# Altium PCB PCB1.PcbDoc (part 2 of 4)
Units mil, origin at the board's own origin, x right, y up, seen from the top; angles counter-clockwise.
Board outline 5048.23 x 6841.54 mil, 6 copper layers (Top Layer, Layer 1, Layer 2, Layer 3, Layer 4, Bottom Layer), stack 32.112 mil thick; 417 components, 339 nets, 2232 pads, 0 vias.
Unrouted connection lines stored in the file: 1169.
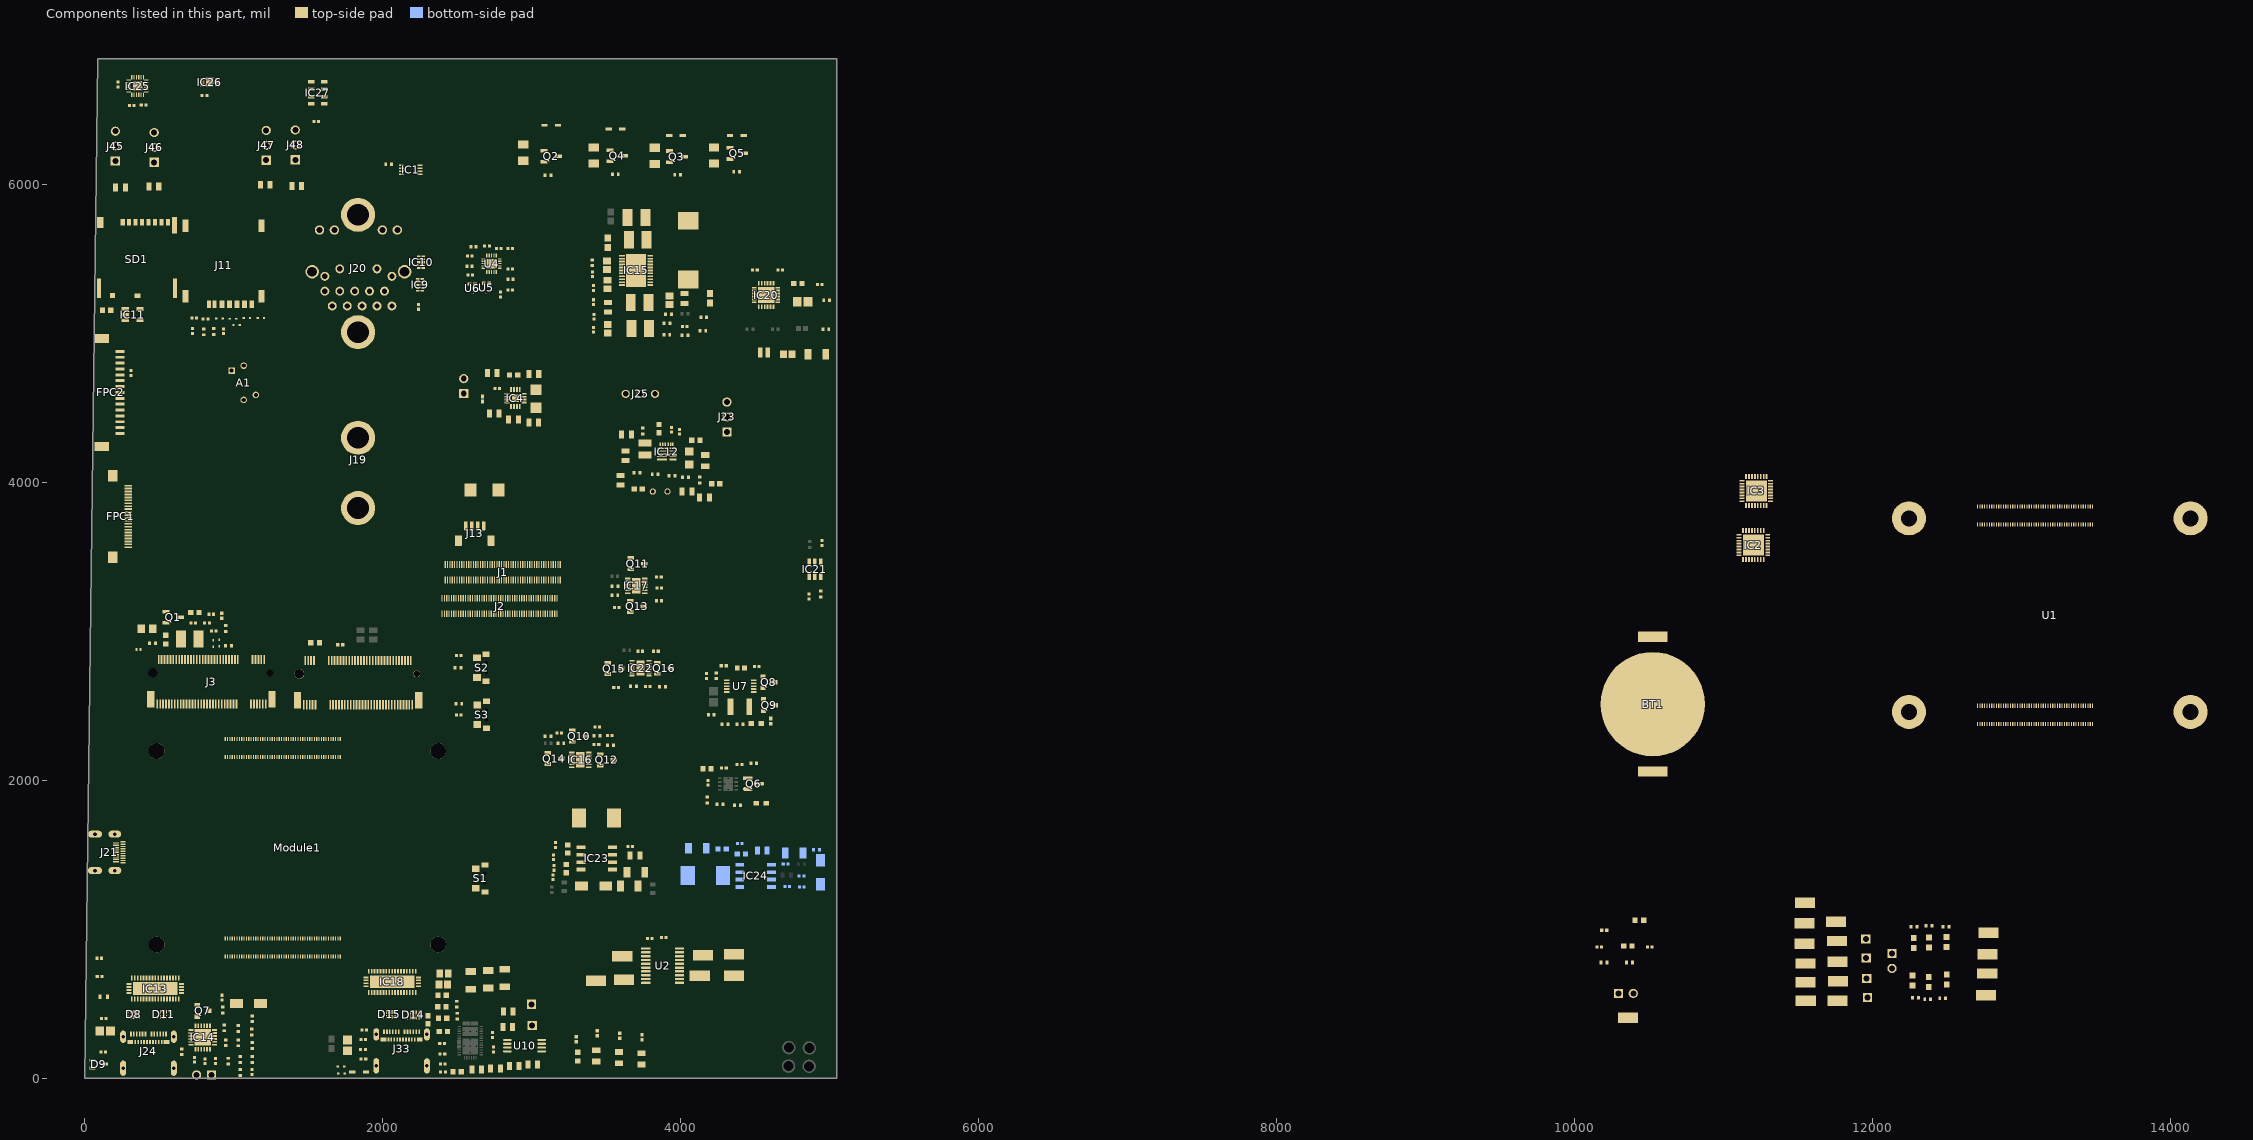
[diagram p2: the components of this part, seen from the top]

## Footprints (in the part's own frame and the unit in brackets; to place one, negate y for a bottom-side part, rotate by r counter-clockwise, add the part's x,y. Pads: shape width x height; smd on the part's side, far side on the other; paste and mask are expansions set on the pad) (continued)
"M.2 M Key connector RPI" [mm]
  rect 0.3x1.55 smd mask+0.102: 1(-9.25,5.275) 2(-9,-2.275) 3(-8.75,5.275) 4(-8.5,-2.275) 5(-8.25,5.275) 6(-8,-2.275) 7(-7.75,5.275) 8(-7.5,-2.275) 9(-7.25,5.275) 10(-7,-2.275) 11(-6.75,5.275) 12(-6.5,-2.275) 13(-6.25,5.275) 14(-6,-2.275) 15(-5.75,5.275) 16(-5.5,-2.275) 17(-5.25,5.275) 18(-5,-2.275) 19(-4.75,5.275) 20(-4.5,-2.275) 21(-4.25,5.275) 22(-4,-2.275) 23(-3.75,5.275) 24(-3.5,-2.275) 25(-3.25,5.275) 26(-3,-2.275) 27(-2.75,5.275) 28(-2.5,-2.275) 29(-2.25,5.275) 30(-2,-2.275) 31(-1.75,5.275) 32(-1.5,-2.275) 33(-1.25,5.275) 34(-1,-2.275) 35(-0.75,5.275) 36(-0.5,-2.275) 37(-0.25,5.275) 38(0,-2.275) 39(0.25,5.275) 40(0.5,-2.275) 41(0.75,5.275) 42(1,-2.275) 43(1.25,5.275) 44(1.5,-2.275) 45(1.75,5.275) 46(2,-2.275) 47(2.25,5.275) 48(2.5,-2.275) 49(2.75,5.275) 50(3,-2.275) 51(3.25,5.275) 52(3.5,-2.275) 53(3.75,5.275) 54(4,-2.275) 55(4.25,5.275) 56(4.5,-2.275) 57(4.75,5.275) 58(5,-2.275) 67(7.25,5.275) 68(7.5,-2.275) 69(7.75,5.275) 70(8,-2.275) 71(8.25,5.275) 72(8.5,-2.275) 73(8.75,5.275) 74(9,-2.275) 75(9.25,5.275)
  round 5.8 hole 3.7 paste-2539.97 mask+0.2: M1(0,-28.25) M2(0,-40.25) M3(0,-58.25) M4(0,-78.25)
  rect 1.2x2.75 smd mask+0.102: S1(-10.35,4.5) S2(10.35,4.5)
  round 1.15 hole 1.15 paste-2539.97 mask+0: Un1(-10,0)
  round 1.65 hole 1.65 paste-2539.97 mask+0: Un2(10,0)
  silkscreen extent -11.5,-78.25 11.5,6.9, body extent -11.1,-3.15 11.1,6.15, height 0.25
MIC-SMD_3P-L2.8-W1.9_AP1688 [mm]
  rect 0.65x0.545 smd paste-100 mask+0.051: 1(0.475,0.739) 2(-0.475,0.739)
  round 0 smd: 3(0,-0.739)
  round 0.5 hole 0.5 unplated paste-2539.97: ""(0,-0.739)
  silkscreen extent -0.99,-1.68 0.99,1.2
MODULE_CM5108032 [mm]
  rect 0.2x0.7 smd paste+0 mask+0.102: 1(7.3,18.54) 2(7.3,15.46) 3(6.9,18.54) 4(6.9,15.46) 5(6.5,18.54) 6(6.5,15.46) 7(6.1,18.54) 8(6.1,15.46) 9(5.7,18.54) 10(5.7,15.46) 11(5.3,18.54) 12(5.3,15.46) 13(4.9,18.54) 14(4.9,15.46) 15(4.5,18.54) 16(4.5,15.46) 17(4.1,18.54) 18(4.1,15.46) 19(3.7,18.54) 20(3.7,15.46) 21(3.3,18.54) 22(3.3,15.46) 23(2.9,18.54) 24(2.9,15.46) 25(2.5,18.54) 26(2.5,15.46) 27(2.1,18.54) 28(2.1,15.46) 29(1.7,18.54) 30(1.7,15.46) 31(1.3,18.54) 32(1.3,15.46) 33(0.9,18.54) 34(0.9,15.46) 35(0.5,18.54) 36(0.5,15.46) 37(0.1,18.54) 38(0.1,15.46) 39(-0.3,18.54) 40(-0.3,15.46) 41(-0.7,18.54) 42(-0.7,15.46) 43(-1.1,18.54) 44(-1.1,15.46) 45(-1.5,18.54) 46(-1.5,15.46) 47(-1.9,18.54) 48(-1.9,15.46) 49(-2.3,18.54) 50(-2.3,15.46) 51(-2.7,18.54) 52(-2.7,15.46) 53(-3.1,18.54) 54(-3.1,15.46) 55(-3.5,18.54) 56(-3.5,15.46) 57(-3.9,18.54) 58(-3.9,15.46) 59(-4.3,18.54) 60(-4.3,15.46) 61(-4.7,18.54) 62(-4.7,15.46) 63(-5.1,18.54) 64(-5.1,15.46) 65(-5.5,18.54) 66(-5.5,15.46) 67(-5.9,18.54) 68(-5.9,15.46) 69(-6.3,18.54) 70(-6.3,15.46) 71(-6.7,18.54) 72(-6.7,15.46) 73(-7.1,18.54) 74(-7.1,15.46) 75(-7.5,18.54) 76(-7.5,15.46) 77(-7.9,18.54) 78(-7.9,15.46) 79(-8.3,18.54) 80(-8.3,15.46) 81(-8.7,18.54) 82(-8.7,15.46) 83(-9.1,18.54) 84(-9.1,15.46) 85(-9.5,18.54) 86(-9.5,15.46) 87(-9.9,18.54) 88(-9.9,15.46) 89(-10.3,18.54) 90(-10.3,15.46) 91(-10.7,18.54) 92(-10.7,15.46) 93(-11.1,18.54) 94(-11.1,15.46) 95(-11.5,18.54) 96(-11.5,15.46) 97(-11.9,18.54) 98(-11.9,15.46) 99(-12.3,18.54) 100(-12.3,15.46) 101(7.3,-15.46) 102(7.3,-18.54) 103(6.9,-15.46) 104(6.9,-18.54) 105(6.5,-15.46) 106(6.5,-18.54) 107(6.1,-15.46) 108(6.1,-18.54) 109(5.7,-15.46) 110(5.7,-18.54) 111(5.3,-15.46) 112(5.3,-18.54) 113(4.9,-15.46) 114(4.9,-18.54) 115(4.5,-15.46) 116(4.5,-18.54) 117(4.1,-15.46) 118(4.1,-18.54) 119(3.7,-15.46) 120(3.7,-18.54) 121(3.3,-15.46) 122(3.3,-18.54) 123(2.9,-15.46) 124(2.9,-18.54) 125(2.5,-15.46) 126(2.5,-18.54) 127(2.1,-15.46) 128(2.1,-18.54) 129(1.7,-15.46) 130(1.7,-18.54) 131(1.3,-15.46) 132(1.3,-18.54) 133(0.9,-15.46) 134(0.9,-18.54) 135(0.5,-15.46) 136(0.5,-18.54) 137(0.1,-15.46) 138(0.1,-18.54) 139(-0.3,-15.46) 140(-0.3,-18.54) 141(-0.7,-15.46) 142(-0.7,-18.54) 143(-1.1,-15.46) 144(-1.1,-18.54) 145(-1.5,-15.46) 146(-1.5,-18.54) 147(-1.9,-15.46) 148(-1.9,-18.54) 149(-2.3,-15.46) 150(-2.3,-18.54) 151(-2.7,-15.46) 152(-2.7,-18.54) 153(-3.1,-15.46) 154(-3.1,-18.54) 155(-3.5,-15.46) 156(-3.5,-18.54) 157(-3.9,-15.46) 158(-3.9,-18.54) 159(-4.3,-15.46) 160(-4.3,-18.54) 161(-4.7,-15.46) 162(-4.7,-18.54) 163(-5.1,-15.46) 164(-5.1,-18.54) 165(-5.5,-15.46) 166(-5.5,-18.54) 167(-5.9,-15.46) 168(-5.9,-18.54) 169(-6.3,-15.46) 170(-6.3,-18.54) 171(-6.7,-15.46) 172(-6.7,-18.54) 173(-7.1,-15.46) 174(-7.1,-18.54) 175(-7.5,-15.46) 176(-7.5,-18.54) 177(-7.9,-15.46) 178(-7.9,-18.54) 179(-8.3,-15.46) 180(-8.3,-18.54) 181(-8.7,-15.46) 182(-8.7,-18.54) 183(-9.1,-15.46) 184(-9.1,-18.54) 185(-9.5,-15.46) 186(-9.5,-18.54) 187(-9.9,-15.46) 188(-9.9,-18.54) 189(-10.3,-15.46) 190(-10.3,-18.54) 191(-10.7,-15.46) 192(-10.7,-18.54) 193(-11.1,-15.46) 194(-11.1,-18.54) 195(-11.5,-15.46) 196(-11.5,-18.54) 197(-11.9,-15.46) 198(-11.9,-18.54) 199(-12.3,-15.46) 200(-12.3,-18.54)
  round 5.8 hole 2.7 mask+0.102: SH1(-24,16.5) SH2(24,16.5) SH3(-24,-16.5) SH4(24,-16.5)
  silkscreen extent -27.5,-20 27.5,20.85, body extent -27.5,-20 27.5,20, height 10.12
MS5607-02BA03 [mm]
  rect 1.1x0.6 smd: 1(-1.1,1.875) 2(-1.1,0.625) 3(-1.1,-0.625) 4(-1.1,-1.875) 5(1.1,-1.875) 6(1.1,-0.625) 7(1.1,0.625) 8(1.1,1.875)
  silkscreen extent -1.5,-2.5 1.5,2.9, body extent -1.5,-2.4 1.5,2.6, height 0.95
"MSOP-10_L3.0-W3.0-P0.50-LS4.9-BL - duplicate" [mm]
  oval 0.3x1 smd: 1(-1,-2.3) 2(-0.5,-2.3) 3(0,-2.3) 4(0.5,-2.3) 5(1,-2.3) 6(1,2.3) 7(0.5,2.3) 8(0,2.3) 9(-0.5,2.3) 10(-1,2.3)
  silkscreen extent -1.52,-1.5 1.5,1.5
ONSC-SOT-23-3-318-08_V [mm] "SOT23, 3-Leads, Body 2.92x1.3mm, Pitch 0.95mm"
  rect 0.9x0.8 smd: 1(-1,0.95) 2(-1,-0.95) 3(1,0)
  silkscreen extent -1.12,-1.46 0.65,2.02, body extent -0.65,-1.46 0.65,1.46, height 1.11
PCBComponent_1 [mm]
  rect 1x2.1 smd: 8(-5.688,6.54) 9(7.312,6.54) 10(7.312,-5.46) 11(-5.688,-5.46)
  rect 0.8x1.3 smd: C1(1.062,7.885) C2(-1.478,7.885) C3(-4.018,7.884) C6(-0.208,7.885) C7(-2.748,7.885)
  rect 0.65x1.3 smd: C5(2.332,7.885) CD(3.282,7.885)
  Keep-Out Layer board cut-out: -3.813,-4.21 -3.85,-4.372 -3.954,-4.503 -4.104,-4.575 -4.271,-4.575 -4.422,-4.503 -4.526,-4.372 -4.563,-4.21 -4.563,-4.21 -4.526,-4.047 -4.422,-3.916 -4.271,-3.844 -4.104,-3.844 -3.954,-3.916 -3.85,-4.047 -3.813,-4.21
  Keep-Out Layer board cut-out: 4.687,-4.21 4.65,-4.372 4.546,-4.503 4.395,-4.575 4.229,-4.575 4.078,-4.503 3.974,-4.372 3.937,-4.21 3.937,-4.21 3.974,-4.047 4.078,-3.916 4.229,-3.844 4.395,-3.844 4.546,-3.916 4.65,-4.047 4.687,-4.21
  Keep-Out Layer circle w0.025: c-4.188,-4.21 r0.375
  Keep-Out Layer circle w0.025: c4.312,-4.21 r0.375
  Keep-Out Layer region: -3.813,-4.21 -3.85,-4.372 -3.954,-4.503 -4.104,-4.575 -4.271,-4.575 -4.422,-4.503 -4.526,-4.372 -4.563,-4.21 -4.563,-4.21 -4.526,-4.047 -4.422,-3.916 -4.271,-3.844 -4.104,-3.844 -3.954,-3.916 -3.85,-4.047 -3.813,-4.21
  Keep-Out Layer region: 4.687,-4.21 4.65,-4.372 4.546,-4.503 4.395,-4.575 4.229,-4.575 4.078,-4.503 3.974,-4.372 3.937,-4.21 3.937,-4.21 3.974,-4.047 4.078,-3.916 4.229,-3.844 4.395,-3.844 4.546,-3.916 4.65,-4.047 4.687,-4.21
  silkscreen extent -5.23,-6.27 6.85,7.38
QFN40P300X300X95-25N-D [mm]
  rect 0.75x0.2 smd: 1(-1.5,1) 2(-1.5,0.6) 3(-1.5,0.2) 4(-1.5,-0.2) 5(-1.5,-0.6) 6(-1.5,-1) 13(1.5,-1) 14(1.5,-0.6) 15(1.5,-0.2) 16(1.5,0.2) 17(1.5,0.6) 18(1.5,1)
  rect 0.2x0.75 smd: 7(-1,-1.5) 8(-0.6,-1.5) 9(-0.2,-1.5) 10(0.2,-1.5) 11(0.6,-1.5) 12(1,-1.5) 19(1,1.5) 20(0.6,1.5) 21(0.2,1.5) 22(-0.2,1.5) 23(-0.6,1.5) 24(-1,1.5)
  rect 1.59x1.75 smd: 25(0,0)
  silkscreen extent -1.97,1.5 -1.78,1.7, body extent -1.5,-1.5 1.5,1.5, height 0.94
QFN50P300X300X80-17N [mm]
  rect 0.85x0.3 smd: 1(-1.45,0.75) 2(-1.45,0.25) 3(-1.45,-0.25) 4(-1.45,-0.75) 9(1.45,-0.75) 10(1.45,-0.25) 11(1.45,0.25) 12(1.45,0.75)
  rect 0.3x0.85 smd: 5(-0.75,-1.45) 6(-0.25,-1.45) 7(0.25,-1.45) 8(0.75,-1.45) 13(0.75,1.45) 14(0.25,1.45) 15(-0.25,1.45) 16(-0.75,1.45)
  rect 1.25x1.25 smd: 17(0,0)
  silkscreen extent -2,1.38 -1.75,1.62, body extent -1.55,-1.55 1.55,1.55, height 0.8
QFN50P350X900X80-43N-D [mm]
  rect 0.85x0.3 smd: 1(-1.8,4) 2(-1.8,3.5) 3(-1.8,3) 4(-1.8,2.5) 5(-1.8,2) 6(-1.8,1.5) 7(-1.8,1) 8(-1.8,0.5) 9(-1.8,0) 10(-1.8,-0.5) 11(-1.8,-1) 12(-1.8,-1.5) 13(-1.8,-2) 14(-1.8,-2.5) 15(-1.8,-3) 16(-1.8,-3.5) 17(-1.8,-4) 22(1.8,-4) 23(1.8,-3.5) 24(1.8,-3) 25(1.8,-2.5) 26(1.8,-2) 27(1.8,-1.5) 28(1.8,-1) 29(1.8,-0.5) 30(1.8,0) 31(1.8,0.5) 32(1.8,1) 33(1.8,1.5) 34(1.8,2) 35(1.8,2.5) 36(1.8,3) 37(1.8,3.5) 38(1.8,4)
  rect 0.3x0.85 smd: 18(-0.75,-4.45) 19(-0.25,-4.45) 20(0.25,-4.45) 21(0.75,-4.45) 39(0.75,4.45) 40(0.25,4.45) 41(-0.25,4.45) 42(-0.75,4.45)
  rect 2.15x7.65 smd: 43(0,0)
  silkscreen extent -2.22,4.62 -1.98,4.87, body extent -1.75,-4.5 1.75,4.5, height 0.8
QFN50P400X400X100-25N-D [mm]
  rect 0.8x0.3 smd: 1(-2,1.25) 2(-2,0.75) 3(-2,0.25) 4(-2,-0.25) 5(-2,-0.75) 6(-2,-1.25) 13(2,-1.25) 14(2,-0.75) 15(2,-0.25) 16(2,0.25) 17(2,0.75) 18(2,1.25)
  rect 0.3x0.8 smd: 7(-1.25,-2) 8(-0.75,-2) 9(-0.25,-2) 10(0.25,-2) 11(0.75,-2) 12(1.25,-2) 19(1.25,2) 20(0.75,2) 21(0.25,2) 22(-0.25,2) 23(-0.75,2) 24(-1.25,2)
  rect 2.8x2.8 smd: 25(0,0)
  silkscreen extent -2.52,1.88 -2.27,2.12, body extent -2.05,-2.05 2.05,2.05, height 1
QFN50P500X500X100-33N-D [mm]
  rect 0.85x0.3 smd: 1(-2.45,1.75) 2(-2.45,1.25) 3(-2.45,0.75) 4(-2.45,0.25) 5(-2.45,-0.25) 6(-2.45,-0.75) 7(-2.45,-1.25) 8(-2.45,-1.75) 17(2.45,-1.75) 18(2.45,-1.25) 19(2.45,-0.75) 20(2.45,-0.25) 21(2.45,0.25) 22(2.45,0.75) 23(2.45,1.25) 24(2.45,1.75)
  rect 0.3x0.85 smd: 9(-1.75,-2.45) 10(-1.25,-2.45) 11(-0.75,-2.45) 12(-0.25,-2.45) 13(0.25,-2.45) 14(0.75,-2.45) 15(1.25,-2.45) 16(1.75,-2.45) 25(1.75,2.45) 26(1.25,2.45) 27(0.75,2.45) 28(0.25,2.45) 29(-0.25,2.45) 30(-0.75,2.45) 31(-1.25,2.45) 32(-1.75,2.45)
  rect 3.6x3.6 smd: 33(0,0)
  silkscreen extent -3,2.38 -2.75,2.62, body extent -2.55,-2.55 2.55,2.55, height 1
QFN-20_L3.0-W3.0-P0.40-BL-EP1.7 [mm]
  rect 0.2x0.665 smd paste-100 mask+0.051: 1(-0.8,-1.407) 2(-0.4,-1.407) 3(0,-1.407) 4(0.4,-1.407) 5(0.8,-1.407) 11(0.8,1.407) 12(0.4,1.407) 13(0,1.407) 14(-0.4,1.407) 15(-0.8,1.407)
  rect 0.665x0.2 smd paste-100 mask+0.051: 6(1.407,-0.8) 7(1.407,-0.4) 8(1.407,0) 9(1.407,0.4) 10(1.407,0.8) 16(-1.407,0.8) 17(-1.407,0.4) 18(-1.407,0) 19(-1.407,-0.4) 20(-1.407,-0.8)
  rect 1.65x1.65 smd paste-100 mask+0.051: 21(0,0)
  silkscreen extent -1.58,-2.11 1.58,1.58
RJ45-TH_LPJG0926HENL_C22457393 [mil]
  round 60 hole 35.43 paste-99999 mask+1.97: 1(-225,254.93) 2(-175,154.93) 3(-125,254.93) 4(-75,154.93) 5(-25,254.93) 6(25,154.93) 7(75,254.93) 8(125,154.93) 9(175,254.93) 10(225,154.93) 11(-225,55.71) 12(-125,5.71) 13(125,5.71) 14(225,55.71)
  round 62.99 hole 40.16 paste-99999 mask+1.97: 15(-261.03,-254.92) 16(-161.03,-254.92) 17(161.02,-254.92) 18(261.02,-254.92)
  round 90.55 hole 66.93 paste-99999 mask+1.97: 19(-310.04,25) 20(310.04,25)
  Keep-Out Layer board cut-out: 287.99,-95.08 281.75,-122.41 264.27,-144.33 239.01,-156.49 210.98,-156.49 185.72,-144.33 168.24,-122.41 162,-95.08 162,-95.08 168.24,-67.75 185.72,-45.83 210.98,-33.67 239.01,-33.67 264.27,-45.83 281.75,-67.75 287.99,-95.08
  Keep-Out Layer board cut-out: -162.01,-95.08 -168.25,-122.41 -185.73,-144.33 -210.99,-156.49 -239.02,-156.49 -264.28,-144.33 -281.76,-122.41 -288,-95.08 -288,-95.08 -281.76,-67.75 -264.28,-45.83 -239.02,-33.67 -210.99,-33.67 -185.73,-45.83 -168.25,-67.75 -162.01,-95.08
  Keep-Out Layer circle w1: c224.99,-95.08 r62.99
  Keep-Out Layer circle w1: c-225.01,-95.08 r62.99
  Keep-Out Layer region: 287.99,-95.08 281.75,-122.41 264.27,-144.33 239.01,-156.49 210.98,-156.49 185.72,-144.33 168.24,-122.41 162,-95.08 162,-95.08 168.24,-67.75 185.72,-45.83 210.98,-33.67 239.01,-33.67 264.27,-45.83 281.75,-67.75 287.99,-95.08
  Keep-Out Layer region: -162.01,-95.08 -168.25,-122.41 -185.73,-144.33 -210.99,-156.49 -239.02,-156.49 -264.28,-144.33 -281.76,-122.41 -288,-95.08 -288,-95.08 -281.76,-67.75 -264.28,-45.83 -239.02,-33.67 -210.99,-33.67 -185.73,-45.83 -168.25,-67.75 -162.01,-95.08
  silkscreen extent -314,-520 314,316
SMB_L4.6-W3.6-LS5.3-RD [mil]
  rect 80.61x86.31 smd paste+0 mask+2: 1(-92.94,0) 2(92.94,0)
  silkscreen extent -123,-77 108,77
SOD2513X120N [mm]
  rect 1.075x0.5 smd: 1(-1.162,0) 2(1.162,0)
  silkscreen extent -1.7,-0.65 0.85,0.65, body extent -1.25,-0.65 1.25,0.65, height 1.2
SODFL1060X40N [mm]
  rect 0.41x0.31 smd: 1(-0.55,0) 2(0.55,0)
  silkscreen extent -1.28,-0.08 -1.12,0.08, body extent -0.5,-0.3 0.5,0.3, height 0.4
SOIC127P600X175-8N [mm]
  rect 1.525x0.65 smd: 1(-2.712,1.905) 2(-2.712,0.635) 3(-2.712,-0.635) 4(-2.712,-1.905) 5(2.712,-1.905) 6(2.712,-0.635) 7(2.712,0.635) 8(2.712,1.905)
  silkscreen extent -3.47,-2.45 1.6,2.58, body extent -3,-2.45 3,2.45, height 1.75
"SOLDER BRIDGE" [mm]
  rect 1x1 smd: 1(-0.6,0) 2(1.1,0)
  Top Layer region: -0.5,-1 0,-1 0,1 -0.5,1
  Top Layer region: -1,-0.5 -0.5,-0.5 -0.5,0.5 -1,0.5
  Top Layer region: 1.5,0.5 1,0.5 1,-0.5 1.5,-0.5
  Top Layer region: 1,1 0.5,1 0.5,-1 1,-1
  Top Layer lines w1: -0.498,0.49 ccw(c-0.4,0) -0.498,-0.49 ; 0.998,0.49 cw(c0.9,0) 0.998,-0.49
SON40P250X200X40-9N-D [mm]
  rect 0.75x0.2 smd: 1(-1.25,0.6) 2(-1.25,0.2) 3(-1.25,-0.2) 4(-1.25,-0.6) 5(1.25,-0.6) 6(1.25,-0.2) 7(1.25,0.2) 8(1.25,0.6)
  rect 1.35x1.7 smd: 9(0,0)
  silkscreen extent -1.75,1.08 -1.5,1.32, body extent -1.3,-1 1.3,1, height 0.4
SON50P300X300X80-13N-D [mm]
  rect 0.9x0.3 smd: 1(-1.45,1.25) 2(-1.45,0.75) 3(-1.45,0.25) 4(-1.45,-0.25) 5(-1.45,-0.75) 6(-1.45,-1.25) 7(1.45,-1.25) 8(1.45,-0.75) 9(1.45,-0.25) 10(1.45,0.25) 11(1.45,0.75) 12(1.45,1.25)
  rect 1.4x2.6 smd: 13(0,0)
  silkscreen extent -2.02,1.78 -1.77,2.02, body extent -1.5,-1.5 1.5,1.5, height 0.8
SON50P500X600X150-23N [mm]
  rect 0.95x0.3 smd: 1(-2.4,2.5) 2(-2.4,2) 3(-2.4,1.5) 4(-2.4,1) 5(-2.4,0.5) 6(-2.4,0) 7(-2.4,-0.5) 8(-2.4,-1) 9(-2.4,-1.5) 10(-2.4,-2) 11(-2.4,-2.5) 12(2.4,-2.5) 13(2.4,-2) 14(2.4,-1.5) 15(2.4,-1) 16(2.4,-0.5) 17(2.4,0) 18(2.4,0.5) 19(2.4,1) 20(2.4,1.5) 21(2.4,2) 22(2.4,2.5)
  rect 3.34x5.579 smd: 23(0,0)
  silkscreen extent -3,3.03 -2.75,3.27, body extent -2.5,-3 2.5,3, height 1.5
SOP50P310X90-8N [mm]
  rect 0.85x0.3 smd: 1(-1.575,0.75) 2(-1.575,0.25) 3(-1.575,-0.25) 4(-1.575,-0.75) 5(1.575,-0.75) 6(1.575,-0.25) 7(1.575,0.25) 8(1.575,0.75)
  silkscreen extent -2,-1 0.8,1.25, body extent -1.55,-1 1.55,1, height 0.77
SOP65P640X120-20N [mm]
  rrect25% 1.57x0.41 smd: 1(-2.87,2.925) 2(-2.87,2.275) 3(-2.87,1.625) 4(-2.87,0.975) 5(-2.87,0.325) 6(-2.87,-0.325) 7(-2.87,-0.975) 8(-2.87,-1.625) 9(-2.87,-2.275) 10(-2.87,-2.925) 11(2.87,-2.925) 12(2.87,-2.275) 13(2.87,-1.625) 14(2.87,-0.975) 15(2.87,-0.325) 16(2.87,0.325) 17(2.87,0.975) 18(2.87,1.625) 19(2.87,2.275) 20(2.87,2.925)
  silkscreen extent -4.29,-3.45 2.2,3.45, body extent -3.2,-3.25 3.2,3.25, height 1.2
SOT65P210X110-3N [mm]
  rect 1.05x0.5 smd: 1(-1.05,0.65) 2(-1.05,-0.65) 3(1.05,0)
  silkscreen extent -1.58,-1 0.18,1.15, body extent -1.05,-1 1.05,1, height 1.1
SOT94P280X100-5N [mm]
  rect 1.25x0.65 smd: 1(-1.25,0.94) 2(-1.25,0) 3(-1.25,-0.94) 4(1.25,-0.94) 5(1.25,0.94)
  silkscreen extent -1.88,-1.45 0.28,1.51, body extent -1.4,-1.45 1.4,1.45, height 1
SOT95P280X125-3N [mm]
  rect 1.2x0.6 smd: 1(-1.25,0.95) 2(-1.25,-0.95) 3(1.25,0)
  silkscreen extent -1.85,-1.48 0.3,1.5, body extent -1.4,-1.48 1.4,1.48, height 1.25
SOT95P280X140-6N [mm]
  rect 1.15x0.6 smd: 1(-1.25,0.95) 2(-1.25,0) 3(-1.25,-0.95) 4(1.25,-0.95) 5(1.25,0) 6(1.25,0.95)
  silkscreen extent -1.83,-1.45 0.33,1.6, body extent -1.4,-1.45 1.4,1.45, height 1.4
SY6982CQDC [mm]
  rect 0.25x0.575 smd: 1(-1.125,1.363) 2(-0.675,1.363) 3(-0.225,1.363) 4(0.225,1.363) 5(0.675,1.363) 6(1.065,1.363)
  rect 1.17x0.225 smd: 7(1.065,0.688)
  rect 1.17x0.2 smd: 8(1.065,0.225) 9(1.065,-0.225) 10(1.065,-0.675)
  rect 1.17x0.35 smd: 11(1.065,-1.2)
  rect 1.68x0.35 smd: 12(-0.81,-1.2)
  rect 1.68x0.2 smd: 13(-0.81,-0.675) 14(-0.81,-0.225) 15(-0.81,0.225)
  rect 1.68x0.225 smd: 16(-0.81,0.688)
  silkscreen extent -1.17,2 -1.08,2.1, body extent -1.5,-1.5 1.5,1.5, height 1
TF-SMD_503398-1892 [mm]
  rect 0.7x1.1 smd: 1(-2.42,6.27) 2(-1.32,6.27) 3(-0.22,6.27) 4(0.88,6.27) 5(1.98,6.27) 6(3.08,6.27) 7(4.18,6.27) 8(5.28,6.27)
  rect 1.05x0.78 smd: 9(0.095,-6.27)
  rect 0.9x0.9 smd: 10(-4.17,-6.21)
  rect 0.7x3.33 smd: 11(-6.48,-4.995) 11(6.48,-4.995)
  rect 1.14x1.83 smd: 11(-6.26,6.255)
  rect 0.86x2.8 smd: 11(6.4,5.77)
  silkscreen extent -6.55,-6.27 6.55,7.78
THERM_NXRT15XH103FA1B030 [mm]
  round 1.05 hole 0.65: 1(-1.25,0) 2(1.25,0)
  silkscreen extent -2,-1 2,1, body extent -2,-1 2,1, height 7.49
TO292P930H600-4 [mm]
  rect 1.1x1.1 / inner round 1.1 / far side rect 1.1x1.1 hole 0.7: 1(-2.065,2.065)
  round 1.1 hole 0.7: 2(0,-2.92) 3(2.065,-2.065) 4(0,2.92)
  silkscreen extent -4.9,-4.65 4.65,5.12, body extent -4.65,-4.65 4.65,5.08, height 6.1
TS24CA [mm]
  rect 0.9x1.2 smd: 1(-2.3,0) 2(2.3,0)
  rect 1.15x1.3 smd: 3(-1.675,-1.55) 4(1.675,-1.55)
  round 0.3 hole 0.6 unplated: MH1(-0.85,0) MH2(0.85,0)
  silkscreen extent -3.4,-0.15 2.3,2.1
TSSOP-8_L4.4-W3.0-P0.65-LS6.4-BL [mil]
  oval 13.9x57.24 smd: 1(-38.39,-115.24) 2(-12.79,-115.24) 3(12.8,-115.24) 4(38.39,-115.24) 5(38.39,115.24) 6(12.8,115.24) 7(-12.79,115.24) 8(-38.39,115.24)
  silkscreen extent -59,-76 59,77
USB-C-SMD_TYPE-C-USB-18 [mm]
  oval 1x2.6 hole 0.6 slot 2.1 at 90 deg paste-2539.97 mask+0.05: 0(-4.32,-2.91) 0(4.32,-2.91)
  oval 1x2.1 hole 0.6 slot 1.6 at 90 deg paste-2539.97 mask+0.05: 0(-4.32,2.45) 0(4.32,2.45)
  rect 0.3x0.8 smd paste-100 mask+0.051: A1(-3,2.91) A2(-2.5,2.91) A3(-2,2.91) A4(-1.5,2.91) A5(-1,2.91) A6(-0.5,2.91) A7(0.5,2.91) A8(1,2.91) A9(1.5,2.91) A10(2,2.91) A11(2.5,2.91) A12(3,2.91)
  rect 1x0.7 smd paste-100 mask+0.05: B1(3.1,1.56) B12(-3.1,1.56)
  rect 0.3x0.7 smd paste-100 mask+0.051: B2(2.25,1.56) B3(1.75,1.56) B4(1.25,1.56) B5(0.75,1.56) B6(0.25,1.56) B7(-0.25,1.56) B8(-0.75,1.56) B9(-1.25,1.56) B10(-1.75,1.56) B11(-2.25,1.56)
  silkscreen extent -4.32,-4.68 4.32,3.66
X1-DFN1006-2_L1.0-W0.6-P0.65-BI [mm]
  rect 0.35x0.55 smd: 1(-0.325,0) 2(0.325,0)
  silkscreen extent -0.91,-0.52 0.91,0.52

## Part data
A1: "LCSC do not place / Buy from digikey: MLX90640ESF-BAA-000-SP", Package="TO39_? FOV 110-4 Melexis", Check_prices=https://www.snapeda.com/parts/MLX90640ESF-BAA-000-TU/Melexis/view-part/?ref=eda, MF="Melexis Technologies", MP=MLX90640ESF-BAA-000-TU, SnapEDA_Link=https://www.snapeda.com/parts/MLX90640ESF-BAA-000-TU/Melexis/view-part/?ref=snap
BT1: library part "RTC battery", "DNP", Case/Package=SMD/SMT, Package Quantity=500, Contact Material=Nickel, Contact Plating=Tin, Height=4.31mm, Lead Free="Lead Free", Material=Bronze, Mounting Technology="Surface Mount,PCB", Number of Batteries=1, Number of Cells=1, Number Of Contacts=2, Packaging="Tape and Reel", Series=-, Termination=SMD/SMT
C1 C4 C116 C117: library part CMP-03020-014070-2, "C13533", Capacitance="0.10 μF", Manufacturer=Kemet, Manufacturer Part Number=C0402C104M3PAC7867, Package=C0402-BB, Temperature="-55°C to +125°C", Temperature Characteristic=X5R, Temperature Coefficient=15%, Temperature Range High=+125°C, Temperature Range Low=-55°C, Tolerance=0.2, Voltage Rating="25 V", Automotive=No, Category=Cap, ComponentLink2Description=Datasheet, ComponentLink2URL=https://content.kemet.com/datasheets/KEM_C1002_X7R_SMD.pdf, Device Class L1="Passive Components", Device Class L2=Capacitors, Device Class L3="Ceramic Capacitors", Digikey Description="CAP CER 0.1UF 25V X5R 0402", Height=0.55mm, Ipc Land Pattern Name=CAPC10050X50, Lead Free=Yes, Material=Ceramic, Octopart=https://octopart.com/c0402c104m3pac7867-kemet-84304880, RoHS=TRUE
C2 C14 C15 C32 C35 C43 C50 C97 C98 C104 C108 C109 C114 C118: library part CMP-00621-81932632-1, "C96446", Capacitance=10µF, Case/Package=0603, Dielectric=X5R, Max Operating Temperature=85°C, Min Operating Temperature=-55°C, Tolerance=10%, Voltage Rating=16V, Halogen Free="Halogen Free", Height=1mm, Lead Free="Lead Free", Material=Ceramic, NexarPartId=81932632, RoHS=Non-Compliant, Voltage Rating (DC)=16V
C3 C20 C21 C22 C23 C24 C27 C28 C39 C52 C64 C65 C66 C67 C68 C105: library part CMP-03020-014070-2, "C52923", Capacitance="0.10 μF", Manufacturer=Kemet, Manufacturer Part Number=C0402C104M3PAC7867, Package=C0402-BB, Temperature="-55°C to +125°C", Temperature Characteristic=X5R, Temperature Coefficient=15%, Temperature Range High=+125°C, Temperature Range Low=-55°C, Tolerance=0.2, Voltage Rating="25 V", Automotive=No, Category=Cap, ComponentLink2Description=Datasheet, ComponentLink2URL=https://content.kemet.com/datasheets/KEM_C1002_X7R_SMD.pdf, Device Class L1="Passive Components", Device Class L2=Capacitors, Device Class L3="Ceramic Capacitors", Digikey Description="CAP CER 0.1UF 25V X5R 0402", Height=0.55mm, Ipc Land Pattern Name=CAPC10050X50, Lead Free=Yes, Material=Ceramic, Octopart=https://octopart.com/c0402c104m3pac7867-kemet-84304880, RoHS=TRUE
C5 C72 C73 C74 C75: library part CMP-03422-001480-1, "C7432790", Capacitance=220uF, Case/Package=1210, Max Operating Temperature=85°C, Min Operating Temperature=-55°C, Tolerance=20%, Voltage Rating=6.3V, Mount="Surface Mount", Packaging="Tape and Reel", RoHS Compliant=Yes
C6 C8 C9 C10 C16 C17 C18 C19 C25 C26 C29 C30 C31 C33 C34 C36 C40 C44 C45 C53 C54 C55 C56 C57 C62 C63 C69 C70 C76 C83 C84 C85 C86 C92 C95 C103 C107 C122 C131 C132 C133 C135: library part CMP-03020-014070-2, "C307331", Capacitance="0.10 μF", Manufacturer=Kemet, Manufacturer Part Number=C0402C104M3PAC7867, Package=C0402-BB, Temperature="-55°C to +125°C", Temperature Characteristic=X5R, Temperature Coefficient=15%, Temperature Range High=+125°C, Temperature Range Low=-55°C, Tolerance=0.2, Voltage Rating="25 V", Automotive=No, Category=Cap, ComponentLink2Description=Datasheet, ComponentLink2URL=https://content.kemet.com/datasheets/KEM_C1002_X7R_SMD.pdf, Device Class L1="Passive Components", Device Class L2=Capacitors, Device Class L3="Ceramic Capacitors", Digikey Description="CAP CER 0.1UF 25V X5R 0402", Height=0.55mm, Ipc Land Pattern Name=CAPC10050X50, Lead Free=Yes, Material=Ceramic, Octopart=https://octopart.com/c0402c104m3pac7867-kemet-84304880, RoHS=TRUE
C7: library part CMP-03020-014070-2, "C1546", Capacitance="0.10 μF", Manufacturer=Kemet, Manufacturer Part Number=C0402C104M3PAC7867, Package=C0402-BB, Temperature="-55°C to +125°C", Temperature Characteristic=X5R, Temperature Coefficient=15%, Temperature Range High=+125°C, Temperature Range Low=-55°C, Tolerance=0.2, Voltage Rating="25 V", Automotive=No, Category=Cap, ComponentLink2Description=Datasheet, ComponentLink2URL=https://content.kemet.com/datasheets/KEM_C1002_X7R_SMD.pdf, Device Class L1="Passive Components", Device Class L2=Capacitors, Device Class L3="Ceramic Capacitors", Digikey Description="CAP CER 0.1UF 25V X5R 0402", Height=0.55mm, Ipc Land Pattern Name=CAPC10050X50, Lead Free=Yes, Material=Ceramic, Octopart=https://octopart.com/c0402c104m3pac7867-kemet-84304880, RoHS=TRUE
C11 C12 C13: library part CMP-03020-014070-2, "C1555", Capacitance="0.10 μF", Manufacturer=Kemet, Manufacturer Part Number=C0402C104M3PAC7867, Package=C0402-BB, Temperature="-55°C to +125°C", Temperature Characteristic=X5R, Temperature Coefficient=15%, Temperature Range High=+125°C, Temperature Range Low=-55°C, Tolerance=0.2, Voltage Rating="25 V", Automotive=No, Category=Cap, ComponentLink2Description=Datasheet, ComponentLink2URL=https://content.kemet.com/datasheets/KEM_C1002_X7R_SMD.pdf, Device Class L1="Passive Components", Device Class L2=Capacitors, Device Class L3="Ceramic Capacitors", Digikey Description="CAP CER 0.1UF 25V X5R 0402", Height=0.55mm, Ipc Land Pattern Name=CAPC10050X50, Lead Free=Yes, Material=Ceramic, Octopart=https://octopart.com/c0402c104m3pac7867-kemet-84304880, RoHS=TRUE
C37 C48: library part CMP-00621-81932632-1, "C1615", Capacitance=10µF, Case/Package=0603, Dielectric=X5R, Max Operating Temperature=85°C, Min Operating Temperature=-55°C, Tolerance=10%, Voltage Rating=16V, Halogen Free="Halogen Free", Height=1mm, Lead Free="Lead Free", Material=Ceramic, NexarPartId=81932632, RoHS=Non-Compliant, Voltage Rating (DC)=16V
C38 C41 C42 C47 C49 C51 C78 C79 C80 C81 C91 C96 C99 C100 C101 C102 C127 C130 C134: library part CMP-03020-014070-2, "C15195", Capacitance="0.10 μF", Manufacturer=Kemet, Manufacturer Part Number=C0402C104M3PAC7867, Package=C0402-BB, Temperature="-55°C to +125°C", Temperature Characteristic=X5R, Temperature Coefficient=15%, Temperature Range High=+125°C, Temperature Range Low=-55°C, Tolerance=0.2, Voltage Rating="25 V", Automotive=No, Category=Cap, ComponentLink2Description=Datasheet, ComponentLink2URL=https://content.kemet.com/datasheets/KEM_C1002_X7R_SMD.pdf, Device Class L1="Passive Components", Device Class L2=Capacitors, Device Class L3="Ceramic Capacitors", Digikey Description="CAP CER 0.1UF 25V X5R 0402", Height=0.55mm, Ipc Land Pattern Name=CAPC10050X50, Lead Free=Yes, Material=Ceramic, Octopart=https://octopart.com/c0402c104m3pac7867-kemet-84304880, RoHS=TRUE
C46 C82 C113: library part CMP-2007-01094-1, "C48579647", Manufacturer=Kemet, Part Number=C0805F223K5RACTU
C58 C59 C60 C61 C110 C111 C115: library part CMP-2007-04160-1, "C45783", Manufacturer="AVX Interconnect / Elco", Part Number=08051C102KAT4A
C71 C77 C94 C128: library part CMP-03020-014070-2, "C1523", Capacitance="0.10 μF", Manufacturer=Kemet, Manufacturer Part Number=C0402C104M3PAC7867, Package=C0402-BB, Temperature="-55°C to +125°C", Temperature Characteristic=X5R, Temperature Coefficient=15%, Temperature Range High=+125°C, Temperature Range Low=-55°C, Tolerance=0.2, Voltage Rating="25 V", Automotive=No, Category=Cap, ComponentLink2Description=Datasheet, ComponentLink2URL=https://content.kemet.com/datasheets/KEM_C1002_X7R_SMD.pdf, Device Class L1="Passive Components", Device Class L2=Capacitors, Device Class L3="Ceramic Capacitors", Digikey Description="CAP CER 0.1UF 25V X5R 0402", Height=0.55mm, Ipc Land Pattern Name=CAPC10050X50, Lead Free=Yes, Material=Ceramic, Octopart=https://octopart.com/c0402c104m3pac7867-kemet-84304880, RoHS=TRUE
C87 C88 C123 C124: library part CMP-1037-05002-1, "C6119973", Case-EIA=1206, Case-Metric=3216, Rated Voltage="10 V", Tolerance=Â±20%, Max Thickness="1.9 mm", Technology=SMT
C89 C90 C125 C126: library part CMP-00621-81932632-1, "C19666", Capacitance=10µF, Case/Package=0603, Dielectric=X5R, Max Operating Temperature=85°C, Min Operating Temperature=-55°C, Tolerance=10%, Voltage Rating=16V, Halogen Free="Halogen Free", Height=1mm, Lead Free="Lead Free", Material=Ceramic, NexarPartId=81932632, RoHS=Non-Compliant, Voltage Rating (DC)=16V
C93 C129: library part CMP-03020-014070-2, "C1567", Capacitance="0.10 μF", Manufacturer=Kemet, Manufacturer Part Number=C0402C104M3PAC7867, Package=C0402-BB, Temperature="-55°C to +125°C", Temperature Characteristic=X5R, Temperature Coefficient=15%, Temperature Range High=+125°C, Temperature Range Low=-55°C, Tolerance=0.2, Voltage Rating="25 V", Automotive=No, Category=Cap, ComponentLink2Description=Datasheet, ComponentLink2URL=https://content.kemet.com/datasheets/KEM_C1002_X7R_SMD.pdf, Device Class L1="Passive Components", Device Class L2=Capacitors, Device Class L3="Ceramic Capacitors", Digikey Description="CAP CER 0.1UF 25V X5R 0402", Height=0.55mm, Ipc Land Pattern Name=CAPC10050X50, Lead Free=Yes, Material=Ceramic, Octopart=https://octopart.com/c0402c104m3pac7867-kemet-84304880, RoHS=TRUE
C106: library part CMP-03020-014070-2, "C7393874", Capacitance="0.10 μF", Manufacturer=Kemet, Manufacturer Part Number=C0402C104M3PAC7867, Package=C0402-BB, Temperature="-55°C to +125°C", Temperature Characteristic=X5R, Temperature Coefficient=15%, Temperature Range High=+125°C, Temperature Range Low=-55°C, Tolerance=0.2, Voltage Rating="25 V", Automotive=No, Category=Cap, ComponentLink2Description=Datasheet, ComponentLink2URL=https://content.kemet.com/datasheets/KEM_C1002_X7R_SMD.pdf, Device Class L1="Passive Components", Device Class L2=Capacitors, Device Class L3="Ceramic Capacitors", Digikey Description="CAP CER 0.1UF 25V X5R 0402", Height=0.55mm, Ipc Land Pattern Name=CAPC10050X50, Lead Free=Yes, Material=Ceramic, Octopart=https://octopart.com/c0402c104m3pac7867-kemet-84304880, RoHS=TRUE
C112 C119 C120 C121: library part CMP-1037-01579-1, "C49326753", Case-EIA=1206, Case-Metric=3216, Rated Voltage="100 V", Tolerance=Â±1%, Max Thickness="1 mm", Technology=SMT
D1 D2 D3 D4 D5 D6 D7 D16 D17: library part ESD9M5.0ST5G, "C242267", Package="SOD-923 ON Semiconductor", Availability=Warning, BuyPart=https://www.snapeda.com/parts/ESD9M5.0ST5G/ON%20Semiconductor/view-part/218558/?ref=eda, MF="ON Semiconductor", Mouser-Purchase-URL=https://snapeda.com/shop?store=Mouser&id=218558, MP=ESD9M5.0ST5G, Price=None, SnapEDA_Link=https://www.snapeda.com/parts/ESD9M5.0ST5G/ON%20Semiconductor/view-part/218558/?ref=snap
D8 D11 D14 D15: "C2941834", JLCPCB Part Class="Extended Part", Manufacturer=WILLSEMI(韦尔), Add into BOM=yes, Convert to PCB=yes, Datasheet=https://atta.szlcsc.com/upload/public/pdf/source/20220218/B099607E95ECFF813E1F5E70D94CE12A.pdf, Device=ESD73034D-10/TR, LCSC Part Name=ESD73034D-10/TR, Manufacturer Part=ESD73034D-10/TR, Supplier=LCSC, Supplier Footprint=DFN2510-10L, Supplier Part=C2941834, Symbol=ESD73034D-10/TR
D9: "C2935152", Manufacturer_Name=STMicroelectronics, Mouser Part Number=511-ESDA25W, Arrow Part Number=ESDA25W, Arrow Price/Stock=https://www.arrow.com/en/products/esda25w/stmicroelectronics?utm_currency=USD&region=nac, Datasheet Link=https://www.st.com/resource/en/datasheet/esdaxxxwx.pdf, Height=1.1mm, Manufacturer_Part_Number=ESDA25W, Mouser Price/Stock=https://www.mouser.co.uk/ProductDetail/STMicroelectronics/ESDA25W?qs=f9uBznyCLhbO4Du0O%2FZtlA%3D%3D
D10: "C1974707", Manufacturer_Name=STMicroelectronics, Mouser Part Number=511-ESDA25P35-1U1M, Arrow Part Number=ESDA25P35-1U1M, Arrow Price/Stock=https://www.arrow.com/en/products/esda25p35-1u1m/stmicroelectronics.html?utm_currency=USD&region=nac, Datasheet Link=https://www.st.com/resource/en/datasheet/esda20p50-1u1m.pdf, Height=0.6mm, Manufacturer_Part_Number=ESDA25P35-1U1M, Mouser Price/Stock=https://www.mouser.co.uk/ProductDetail/STMicroelectronics/ESDA25P35-1U1M?qs=aVyJF2WnouQUWqgNP85ZrA%3D%3D
D12 D18 D19: "C8678", Manufacturer_Name="HY Electronic", Datasheet Link=https://datasheet.datasheetarchive.com/originals/distributors/Datasheets-3/DSA-43252.pdf, Height=2.62mm, Manufacturer_Part_Number=SS34A
D13: "C32513", JLCPCB Part Class="Extended Part", Manufacturer=MDD(辰达半导体), Manufacturer Part=SS54B, spicePre=D, spiceSymbolName=SS54, Supplier=LCSC, Supplier Part=C32513
FB1: library part CMP-19111-000018-1, "C16903", Case Code (Imperial)=0805, Case Code (Metric)=2012, Current Rating=200mA, DC Resistance (DCR)=800mR, Frequency=100MHz, Max Operating Temperature=125°C, Min Operating Temperature=-40°C, Package Quantity=1, Case/Package=0805, Depth=1.25mm, Height=1.25mm, Impedance=2.7kR, Lead Free="Lead Free", Length=2mm, Material=Ferrite, Max Current Rating=200mA, Max DC Current=200mA, Mount="Surface Mount", Number of Lines=1, Packaging="Tape and Reel", RoHS Compliant=No, Series=HZ, Shielding=Unshielded, Termination=SMD/SMT, Test Frequency=100MHz, Weight=0.00392oz, Width=0.049inch
FPC1: library part "CSI Bottom Contact Right Angle", "C262668", JLCPCB Part Class="Extended Part", Manufacturer=JS(钜硕电子), Contributor=LCSC, Manufacturer Part=AFC01-S22FCA-00, spicePre=F, spiceSymbolName=AFC01-S22FCA-00, Supplier=LCSC, Supplier Part=C262668
FPC2: library part "DSI Top and Bottom Connector", "C49166884", JLCPCB Part Class="Extended Part", LCSC Part Name="翻盖式 双侧触点/上下接 P数:15P 间距:1mm", Manufacturer=HC(虹成电子), Operating Temperature=-40℃~+85℃, Add into BOM=yes, Contact Material=-, Contact Plating=-, Contact Type="Double-Sided Contacts, Top and Bottom Entry", Convert to PCB=yes, Datasheet=https://item.szlcsc.com/datasheet/HC-FPC-1.0-15P-FHH20/51557854.html, Device=HC-FPC-1.0-15P-FHH20, FFC, FCB Thickness=0.3mm, Height Above Board=2mm, Locking Feature="Hinged Lid", Manufacturer Part=HC-FPC-1.0-15P-FHH20, Mounting Type="Surface Mount, Right Angle", Number Of Contacts=15P, Pitch=1mm, Supplier=LCSC, Supplier Footprint=SMD,P=1mm,卧贴, Supplier Part=C49166884, Symbol=HC-FPC-1.0-15P-FHH20
IC1: "C33196", Manufacturer_Name="Texas Instruments", Mouser Part Number=595-PCA9306DCUR, Arrow Part Number=PCA9306DCUR, Arrow Price/Stock=https://www.arrow.com/en/products/pca9306dcur/texas-instruments?region=nac, Datasheet Link=http://www.ti.com/lit/gpn/pca9306, Height=0.9mm, Manufacturer_Part_Number=PCA9306DCUR, Mouser Price/Stock=https://www.mouser.co.uk/ProductDetail/Texas-Instruments/PCA9306DCUR?qs=wgAEGBTxy7nQr5PRxNBUNA%3D%3D
IC2: "C5267436", Manufacturer_Name=STMicroelectronics, Mouser Part Number=511-ST25R3916B-AQWT, Arrow Part Number=ST25R3916B-AQWT, Arrow Price/Stock=https://www.arrow.com/en/products/st25r3916b-aqwt/stmicroelectronics.html?utm_currency=USD&region=nac, Datasheet Link=https://www.st.com/resource/en/datasheet/st25r3916b.pdf, Height=1mm, Manufacturer_Part_Number=ST25R3916B-AQWT, Mouser Price/Stock=https://www.mouser.co.uk/ProductDetail/STMicroelectronics/ST25R3916B-AQWT?qs=Znm5pLBrcAK6gbJpvnT4Gw%3D%3D
IC3: library part TRF7964ARHBR, "C2654840", Manufacturer_Name="Texas Instruments", Mouser Part Number=595-TRF7964ARHBR, Arrow Part Number=TRF7964ARHBR, Arrow Price/Stock=https://www.arrow.com/en/products/trf7964arhbr/texas-instruments, Datasheet Link=http://www.ti.com/lit/gpn/trf7964a, Height=1mm, Manufacturer_Part_Number=TRF7964ARHBR, Mouser Price/Stock=https://www.mouser.co.uk/ProductDetail/Texas-Instruments/TRF7964ARHBR?qs=4whTb%2F0XQMjbuhjN8zVfxA%3D%3D
IC4: "C910544", Manufacturer_Name="Analog Devices", Mouser Part Number=700-MAX98357AETE+T, Arrow Part Number=MAX98357AETE+T, Arrow Price/Stock=https://www.arrow.com/en/products/max98357aetet/analog-devices?utm_currency=USD&region=nac, Datasheet Link=https://datasheets.maximintegrated.com/en/ds/MAX98357A-MAX98357B.pdf, Height=0.8mm, Manufacturer_Part_Number=MAX98357AETE+T, Mouser Price/Stock=https://www.mouser.co.uk/ProductDetail/Analog-Devices-Maxim-Integrated/MAX98357AETE%2bT?qs=AAveGqk956HhNpoJjF5x2g%3D%3D
IC5 IC6 IC7 IC8 IC19: library part B0520WS-7-F, "C7502696", Manufacturer_Name="Lattice Semiconductor", Mouser Part Number=N/A, Datasheet Link=https://www.diodes.com/assets/Datasheets/ds30235.pdf, Height=1.2mm, Manufacturer_Part_Number=B0520WS-7-F, Mouser Price/Stock=https://www.mouser.com/Search/Refine.aspx?Keyword=N%2FA
IC9 IC10: "C90627", Manufacturer_Name="Texas Instruments", Mouser Part Number=595-TPD4EUSB30DQAR, Arrow Part Number=TPD4EUSB30DQAR, Arrow Price/Stock=https://www.arrow.com/en/products/tpd4eusb30dqar/texas-instruments.html?utm_currency=USD&region=nac, Datasheet Link=http://www.ti.com/lit/gpn/tpd4eusb30, Manufacturer_Part_Number=TPD4EUSB30DQAR, Mouser Price/Stock=https://www.mouser.co.uk/ProductDetail/Texas-Instruments/TPD4EUSB30DQAR?qs=Ze4%2FuFuz19JpY4uqYOLMbQ%3D%3D
IC11: "C250547", Manufacturer_Name=RICHTEK, Mouser Part Number=835-RT9742GGJ5, Datasheet Link=https://componentsearchengine.com/Datasheets/2/RT9742GGJ5.pdf, Height=1mm, Manufacturer_Part_Number=RT9742GGJ5, Mouser Price/Stock=https://www.mouser.co.uk/ProductDetail/Richtek/RT9742GGJ5?qs=amGC7iS6iy%2FZU2tAnLZxIA%3D%3D
IC12: library part SY6982CQDC, "C7435940", Manufacturer_Name=Silergy, Datasheet Link=https://arvidtek.com/wp-content/uploads/2025/01/2307111037_Silergy-Corp-SY6982CQDC_C7435940.pdf, Height=0.9mm, Manufacturer_Part_Number=SY6982CQDC
IC13 IC18: "C701818", Manufacturer_Name="Texas Instruments", Mouser Part Number=595-HD3SS6126RUAR, Arrow Part Number=HD3SS6126RUAR, Arrow Price/Stock=https://www.arrow.com/en/products/hd3ss6126ruar/texas-instruments?region=nac, Datasheet Link=http://www.ti.com/lit/gpn/hd3ss6126, Height=0.8mm, Manufacturer_Part_Number=HD3SS6126RUAR, Mouser Price/Stock=https://www.mouser.co.uk/ProductDetail/Texas-Instruments/HD3SS6126RUAR?qs=3oHdzXquMOxuOQpaguz6Og%3D%3D
IC14: library part STUSB4500QTR, "C2678061", Manufacturer_Name=STMicroelectronics, Mouser Part Number=511-STUSB4500QTR, Arrow Part Number=STUSB4500QTR, Arrow Price/Stock=https://www.arrow.com/en/products/stusb4500qtr/stmicroelectronics?utm_currency=USD&region=europe, Datasheet Link=https://www.st.com/resource/en/datasheet/stusb4500.pdf, Height=1mm, Manufacturer_Part_Number=STUSB4500QTR, Mouser Price/Stock=https://www.mouser.co.uk/ProductDetail/STMicroelectronics/STUSB4500QTR?qs=wUXugUrL1qyQbYMSzG1ujg%3D%3D
IC15: "C179745", Manufacturer_Name="Texas Instruments", Mouser Part Number=595-TPS53318DQPR, Arrow Part Number=TPS53318DQPR, Arrow Price/Stock=https://www.arrow.com/en/products/tps53318dqpr/texas-instruments.html?utm_currency=USD&region=nac, Datasheet Link=http://www.ti.com/lit/gpn/TPS53318, Height=1.5mm, Manufacturer_Part_Number=TPS53318DQPR, Mouser Price/Stock=https://www.mouser.co.uk/ProductDetail/Texas-Instruments/TPS53318DQPR?qs=4whTb%2F0XQMghW0Cmq9uGjw%3D%3D
IC16 IC17 IC22: "C3215601", Manufacturer_Name="Texas Instruments", Mouser Part Number=595-LM74810QDRRRQ1, Arrow Part Number=LM74810QDRRRQ1, Arrow Price/Stock=null?region=nac, Datasheet Link=https://www.ti.com/lit/ds/symlink/lm7481-q1.pdf?ts=1623392902286&ref_url=https%253A%252F%252Fwww.ti.com%252Fproduct%252FLM7481-Q1%253FkeyMatch%253DLM74810QDRRRQ1%2526tisearch%253Dsearch-everything%2526usecase%253DOPN, Height=0.8mm, Manufacturer_Part_Number=LM74810QDRRRQ1, Mouser Price/Stock=https://www.mouser.co.uk/ProductDetail/Texas-Instruments/LM74810QDRRRQ1?qs=KUoIvG%2F9IlZgYO4cz5Fhzw%3D%3D
IC20: "C2765094", Manufacturer_Name="Texas Instruments", Mouser Part Number=595-BQ25886RGER, Arrow Part Number=BQ25886RGER, Arrow Price/Stock=https://www.arrow.com/en/products/bq25886rger/texas-instruments?region=nac, Datasheet Link=http://www.ti.com/lit/gpn/BQ25886, Height=1mm, Manufacturer_Part_Number=BQ25886RGER, Mouser Price/Stock=https://www.mouser.co.uk/ProductDetail/Texas-Instruments/BQ25886RGER?qs=mAH9sUMRCttbI1j7uI64xQ%3D%3D
IC21: "C116509", Manufacturer_Name=Hycon, Datasheet Link=https://datasheet.lcsc.com/szlcsc/HYCON-Tech-HY2120CB_C116509.pdf, Height=1.4mm, Manufacturer_Part_Number=HY2120-CB
IC23 IC24: library part TPS54331D, "C9865", Manufacturer_Name="Texas Instruments", Mouser Part Number=595-TPS54331D, Arrow Part Number=TPS54331D, Arrow Price/Stock=https://www.arrow.com/en/products/tps54331d/texas-instruments?utm_currency=USD&region=europe, Datasheet Link=http://www.ti.com/lit/gpn/tps54331, Height=1.75mm, Manufacturer_Part_Number=TPS54331D, Mouser Price/Stock=https://www.mouser.co.uk/ProductDetail/Texas-Instruments/TPS54331D?qs=QyYHynRG50pEbpiybdzwkw%3D%3D
IC25: library part MPU-6500, "C50278", Manufacturer_Name=TDK, Mouser Part Number=410-MPU-6500, Arrow Part Number=MPU-6500, Arrow Price/Stock=https://www.arrow.com/en/products/mpu-6500/invensense?utm_currency=USD&region=europe, Datasheet Link=https://product.tdk.com/system/files/dam/doc/product/sensor/mortion-inertial/imu/data_sheet/mpu-6500-datasheet2.pdf, Height=0.95mm, Manufacturer_Part_Number=MPU-6500, Mouser Price/Stock=https://www.mouser.co.uk/ProductDetail/TDK-InvenSense/MPU-6500?qs=u4fy%2FsgLU9PiIOIlWOSPhQ%3D%3D
IC26: library part MLX90392ELQ-AAA-011-RE, "C17495733 / Digikey Replacment Part Just in Case: MLX90392ELQ-AAA-010-RE (10X finer resolution)", Manufacturer_Name=Melexis, Mouser Part Number=482-90392ELQAAA011RE, Datasheet Link=https://media.melexis.com/-/media/files/documents/datasheets/mlx90392-datasheet-melexis.pdf, Height=0.4mm, Manufacturer_Part_Number=MLX90392ELQ-AAA-011-RE, Mouser Price/Stock=https://www.mouser.co.uk/ProductDetail/Melexis/MLX90392ELQ-AAA-011-RE?qs=DRkmTr78QAR2mFb3EZGuDA%3D%3D
IC27: library part MS560702BA03-50, "C97627", Manufacturer_Name="TE Connectivity", Mouser Part Number=824-MS560702BA03-50, Arrow Part Number=MS560702BA03-50, Arrow Price/Stock=https://www.arrow.com/en/products/ms560702ba03-50/te-connectivity?utm_currency=USD&region=europe, Datasheet Link=https://www.te.com/commerce/DocumentDelivery/DDEController?Action=srchrtrv&DocNm=MS5607-02BA03&DocType=Data%20Sheet&DocLang=English&PartCntxt=MS560702BA03-50&DocFormat=pdf, Manufacturer_Part_Number=MS560702BA03-50, Mouser Price/Stock=https://www.mouser.co.uk/ProductDetail/Measurement-Specialties/MS560702BA03-50?qs=urSpXqmdEVImCZG1H%252BT8ng%3D%3D
J1 J2: "C6782225", Package=None, Check_prices=https://www.snapeda.com/parts/101642271001A1RLF/Amphenol/view-part/?ref=eda, MF=Amphenol, MP=101642271001A1RLF, SnapEDA_Link=https://www.snapeda.com/parts/101642271001A1RLF/Amphenol/view-part/?ref=snap
J3: "C590859", Manufacturer_Name="TE Connectivity", Mouser Part Number=571-2199230-3, Arrow Part Number=2199230-3, Arrow Price/Stock=https://www.arrow.com/en/products/2199230-3/te-connectivity?utm_currency=USD&region=nac, Datasheet Link=https://componentsearchengine.com/Datasheets/2/2199230-3.pdf, Manufacturer_Part_Number=2199230-3, Mouser Price/Stock=https://www.mouser.co.uk/ProductDetail/TE-Connectivity/2199230-3?qs=EQCnRgr4b6HElQOKr5ma1Q%3D%3D
J4 J5 J6 J7 J8 J9 J10 J26 J27 J28 J29 J30 J32 J34 J35 J37 J38 J40 J41 J42 J43 J44 J49: library part CMP-2000-05183-2, "PC TEST POINT MINIATURE", Manufacturer=keystone, Manufacturer Part Number=5015, Automotive=No, Category=Conn, ComponentLink2Description=Datasheet, ComponentLink2URL=http://www.keyelco.com/product-pdf.cfm?p=1353, Conn Orientation=Straight, Contact Material=Silver, Device Class L1=Connectors, Device Class L2=unset, Device Class L3=unset, Digikey Description="PC TEST POINT MINIATURE", Height=1.65mm, Lead Free=Yes, Number Of Contacts=1, Octopart=https://octopart.com/5015-keystone-3822, Package=5015, RoHS=TRUE
J11: library part SMN-303, "C266888", JLCPCB Part Class="Extended Part", LCSC Part Name="自弹式 NanoSIM卡 卡座", Manufacturer=XUNPU(讯普), Operating Temperature=-25℃~+85℃, Rated Voltage (Max)=-, Add into BOM=yes, Card Connection Mode=Push-Push, Card Detection="With Card Detect", Card Type="Nano-SIM Card", Connector Type="Connector and Ejector", Convert to PCB=yes, Datasheet=https://item.szlcsc.com/datasheet/SMN-303/256999.html, Device=SMN-303, Height Above Board=1.37mm, Manufacturer Part=SMN-303, Supplementary Features=-, Supplier=LCSC, Supplier Footprint=SMD, Supplier Part=C266888, Symbol=SMN-303
J12 J18: library part CMP-02766-001458-1, "CONN HEADER VERT 2POS 2.54MM", Color=Black, Flammability Rating="UL94 V-0", Max Current Rating=7.6A, Max Operating Temperature=125°C, Max Voltage Rating (AC)=550V, Min Operating Temperature=-55°C, Package Quantity=1, Connector Type=Header, Contact Finish - Mating=GOLD, Contact Material=Bronze, Contact Mating Length=0.23inch, Contact Plating=Gold, Contact Shape=Square, Contact Type="Male Pin", Depth=2.54mm, Fastening Type=Pull, Gender=Male, Housing Color=Black, Housing Material=Polyester, Insulation Color=Black, Insulation Material=PBT, Length=5.08mm, Mount="Through Hole", Number Of Contacts=2, Number of Positions=2, Number of Rows=1, Orientation=Straight, Packaging=Bulk, Pitch=2.54mm, Radiation Hardening=No, REACH SVHC="No SVHC", RoHS Compliant=Yes, Series=TSW, Termination=Solder
J13: library part "FAN connector", "Board Connector, 4 Contact(s), 1 Row(s), Male, Straight, Surface Mount Terminal", Color=Natural, Package Quantity=1500, Contact Material="Copper Alloy", Contact Plating=Tin,Lead, Contact Type="Male Pin", Housing Color=Natural, Housing Material=Nylon, Lead Free="Contains Lead", Mounting Technology="Surface Mount", Number Of Contacts=4, Number of Positions=4, Number of Rows=1, Orientation=Vertical, Packaging="Cut Tape", Pitch=0.039inch, Series=SR, Termination=Solder
J14 J15 J16 J17 J36 J39: library part CMP-02766-001775-1, "CONN HEADER VERT 1POS", Color=Black, Flammability Rating="UL94 V-0", Max Current Rating=7.6A, Max Operating Temperature=125°C, Max Voltage Rating (AC)=550V, Min Operating Temperature=-55°C, Connector Type=Header, Contact Finish - Mating=GOLD, Contact Material=Bronze, Contact Mating Length=0.23inch, Contact Plating=Gold, Contact Shape=Square, Contact Type="Male Pin", Depth=2.54mm, Fastening Type=Pull, Gender=Male, Housing Color=Black, Housing Material=Polyester, Insulation Color=Black, Insulation Material=PBT, Lead Free="Lead Free", Length=2.54mm, Mount="Through Hole", Number Of Contacts=1, Number of Positions=1, Number of Rows=1, Orientation=Straight, Packaging=Bulk, Radiation Hardening=No, Reach SVHC Compliant=Yes, RoHS Compliant=Yes, Series=TSW, Termination=Solder, Width=2.54mm
J19: library part "M.2 M Key connector RPI", "C841661", Color=Black, Contact Current Rating=500mA, Max Operating Temperature=80°C, Min Operating Temperature=-40°C, Contact Material="Copper Alloy", Contact Plating=Gold,Matte, ELV=Compliant, Gender=Female, Height=0.165inch, Housing Color=Black, Housing Material=Thermoplastic, Insulation Material=Thermoplastic, Length=0.862inch, Mount="Surface Mount", Number of Positions=67, Number of Rows=2, Orientation="Right Angle", Packaging="Tape and Reel", PCB Mounting Orientation="Right Angle", Pitch=0.5mm, RoHS Compliant=Yes, SM P/N=13806721, Termination=Solder, Width=8.7mm
J20: library part "Ethernet Correct", "C22457393", JLCPCB Part Class="Extended Part", LCSC Part Name="弯插 带LED", Manufacturer=LINK-PP(连普科技), Operating Temperature=0℃~+70℃, Add into BOM=yes, Connector Type="RJ45 Jack", Contact Material="Phosphor Bronze", Contact Plating=Gold, Convert to PCB=yes, Datasheet=https://item.szlcsc.com/datasheet/LPJG0926HENL/24125913.html, Device=LPJG0926HENL_C22457393, LED="With LED", Manufacturer Part=LPJG0926HENL, Mounting Type="Right Angle", Number of Ports=1, PoE=Non-PoE, Shielding=Shielded, Supplier=LCSC, Supplier Footprint=插件, Supplier Part=C22457393, Symbol=LPJG0926HENL_C22457393
J21: library part HDMI, "C711358", Current Rating=300mA, JLCPCB Part Class="Extended Part", LCSC Part Name="HDMI-D 母 19P", Manufacturer=华宇创, Operating Temperature=-40℃~+85℃, Voltage Rating=-, Add into BOM=yes, Connector Type=HDMI-D, Convert to PCB=yes, Datasheet=https://item.szlcsc.com/datasheet/HYC23-HDMID19-650/750253.html, Device=HYC23-HDMID19-650, Gender=Female, Manufacturer Part=HYC23-HDMID19-650, Mounting Type="Surface Mount, Right Angle", Number of Pins=19P, Supplier=LCSC, Supplier Footprint=SMD, Supplier Part=C711358, Symbol=HYC23-HDMID19-650
J22: library part CMP-02766-001740-1, "CONN HEADER VERT 2POS 2.54MM", Color=Black, Flammability Rating="UL94 V-0", Max Current Rating=7.6A, Max Operating Temperature=125°C, Max Voltage Rating (AC)=550V, Min Operating Temperature=-55°C, Package Quantity=1, Connector Type=Header, Contact Finish - Mating=GOLD, Contact Material=Bronze, Contact Mating Length=0.32inch, Contact Plating=Gold, Contact Shape=Square, Contact Type="Male Pin", Depth=2.54mm, Fastening Type=Pull, Gender=Male, Housing Color=Black, Housing Material=Polyester, Insulation Color=Black, Insulation Material=PBT, Lead Free="Lead Free", Length=5.08mm, Mount="Through Hole", Number Of Contacts=2, Number of Positions=2, Number of Rows=1, Orientation=Straight, Packaging=Bulk, Pitch=2.54mm, Radiation Hardening=No, REACH SVHC="No SVHC", RoHS Compliant=Yes, Series=TSW, Termination=Solder, Width=2.54mm
J23 J45 J46 J47 J48: library part CMP-02766-001743-1, "CONN HEADER VERT 3POS 2.54MM", Color=Black, Flammability Rating="UL94 V-0", Max Current Rating=7.6A, Max Operating Temperature=125°C, Max Voltage Rating (AC)=550V, Min Operating Temperature=-55°C, Package Quantity=1, Connector Type=Header, Contact Finish - Mating=GOLD, Contact Material=Bronze, Contact Mating Length=0.32inch, Contact Plating=Gold, Contact Shape=Square, Contact Type="Male Pin", Depth=2.54mm, Fastening Type=Pull, Gender=Male, Height=10.67mm, Housing Color=Black, Housing Material=Polyester, Insulation Color=Black, Insulation Material=PBT, Lead Free="Lead Free", Length=7.62mm, Mount="Through Hole", Number Of Contacts=3, Number of Positions=3, Number of Rows=1, Orientation=Straight, Packaging=Bulk, Pitch=2.54mm, Radiation Hardening=No, REACH SVHC="No SVHC", RoHS Compliant=Yes, Series=TSW, Termination=Solder, Width=2.54mm
J24 J33: "C134092", Current Rating-Power=-, Detection color=Black, JLCPCB Part Class="Extended Part", LCSC Part Name="Type-C 母", Manufacturer=MOLEX, Operating Temperature=-30℃~+85℃, Voltage Rating=30V, Add into BOM=yes, Connect-Disconnect Life="10,000 Cycles", Connector Type=Type-C, Convert to PCB=yes, Datasheet=https://www.molex.com/content/dam/molex/molex-dot-com/products/automated/en-us/salesdrawingpdf/105/105450/1054500101_sd.pdf?inline\, Device=1054500101, Gender=Female, Manufacturer Part=1054500101, Number Of Contacts=24P, Number of Ports=1, Protocol Standard="USB 3.2", Supplier=LCSC, Supplier Footprint=SMD, Supplier Part=C134092, Symbol=105450-0101
J25: library part B3B-XH-A_LF__SN_, "C144394", Arrow Part Number=B3B-XH-A(LF)(SN), Manufacturer_Name="JST (JAPAN SOLDERLESS TERMINALS)", Mouser Part Number=306-B3BXHALFSNP, Arrow Price/Stock=https://www.arrow.com/en/products/b3b-xh-a-lf-sn/jst-manufacturing?utm_currency=USD&region=europe, Datasheet Link=https://datasheet.lcsc.com/szlcsc/1812131720_JST-Sales-America-B3B-XH-A-LF-SN_C144394.pdf, Height=7mm, Manufacturer_Part_Number=B3B-XH-A(LF)(SN), Mouser Price/Stock=https://www.mouser.co.uk/ProductDetail/JST-Commercial/B3B-XH-ALFSN?qs=cdbOS8ANM9BVkoboCCIEMQ%3D%3D